# Altium PCB Copy of LED_v2.PcbDoc
Units mm, origin at the board's own origin, x right, y up, seen from the top; angles counter-clockwise.
Board outline 100 x 30 mm, 2 copper layers (Top Layer, Bottom Layer), stack 1.58 mm thick; 51 components, 38 nets, 138 pads, 16 vias.
Unrouted connection lines stored in the file: 34.
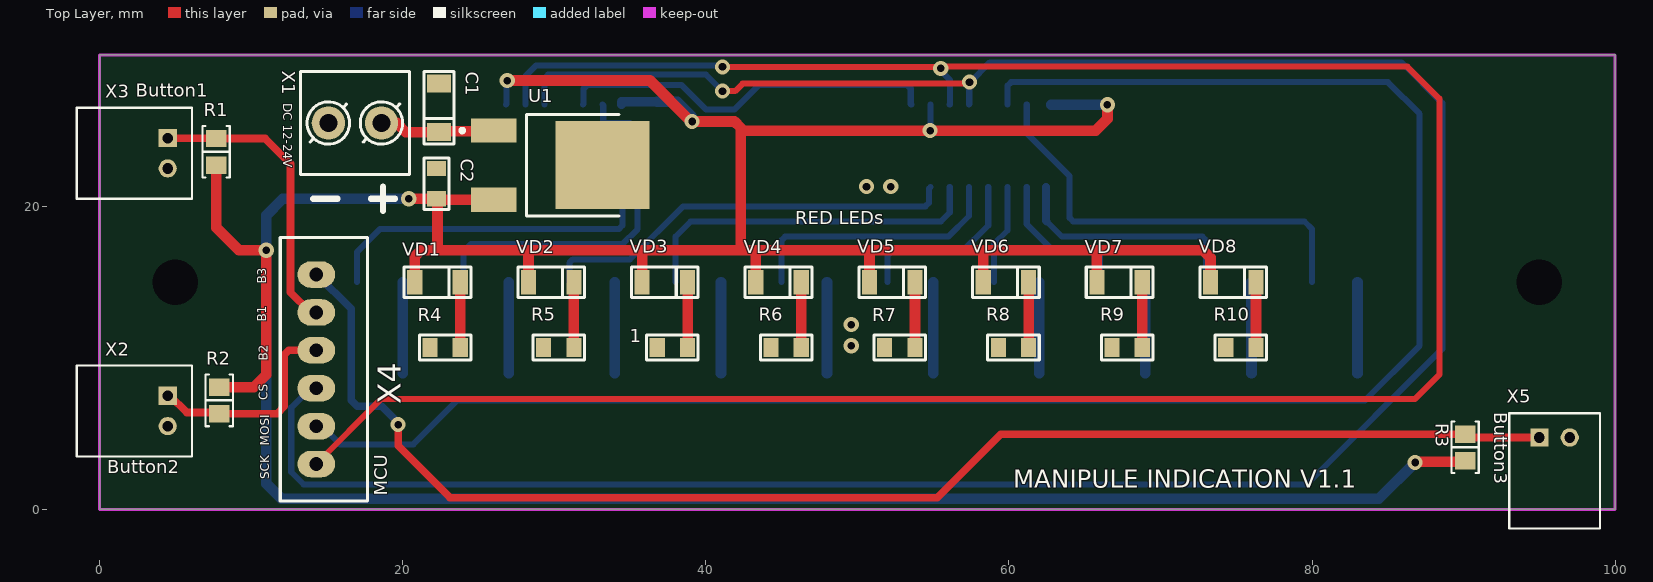
[diagram p0: Top Layer view]
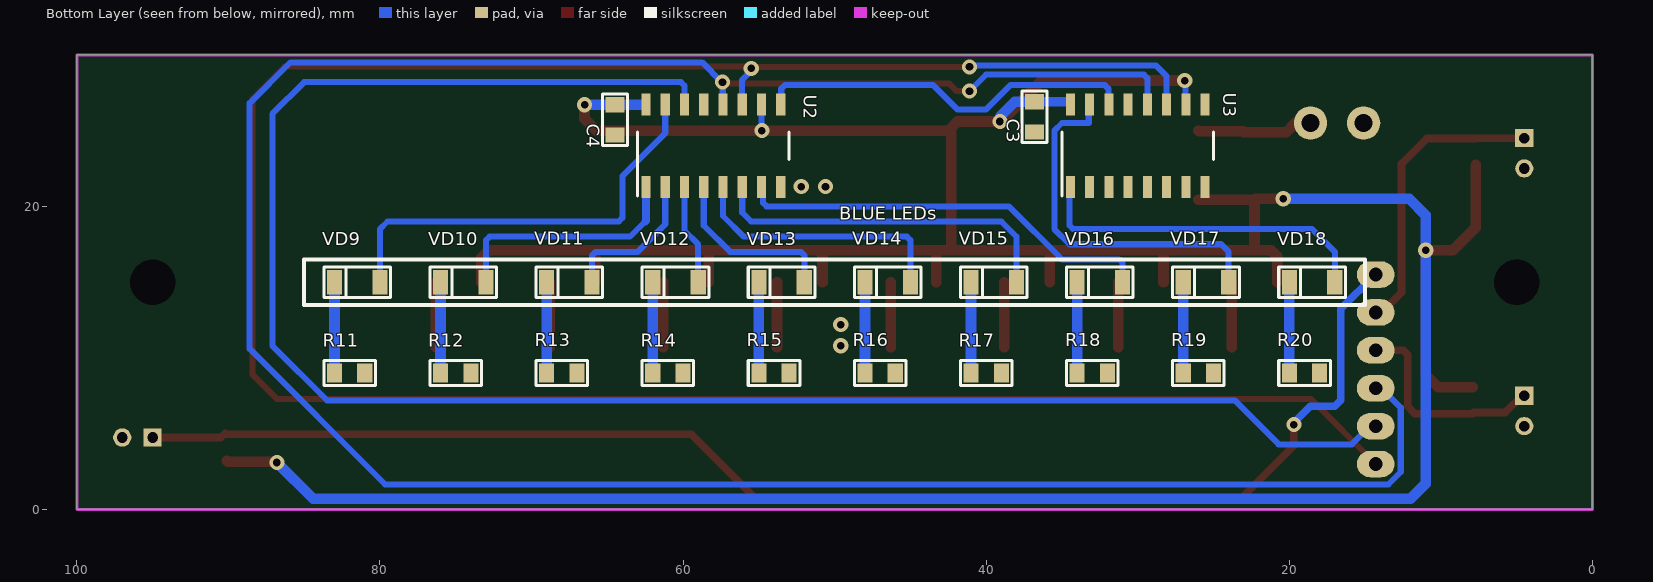
[diagram p1: Bottom Layer view, seen from below]

## Layer stack, top to bottom
Top Solder: solder mask 0.0102, Solder Resist, Dk 3.5
Top Layer: signal copper 0.0356
Dielectric 1: dielectric 1.509, FR-4, Dk 4.8
Bottom Layer: signal copper 0.0356
Bottom Solder: solder mask 0.0102, Solder Resist, Dk 3.5

## Board outline
0,0 100,0 100,30 0,30

## Design rules (kind name [scope] priority, off if disabled: settings)
BoardOutlineClearance [All] p1: gap=0.3 ignorepadtopadclearanceinfootprint=FALSE
Clearance Pad_clearance [(ObjectKind = 'Pad') And (PadViaLibraryTemplate = 'c152h300')] p1: gap=1.5 ignorepadtopadclearanceinfootprint=FALSE except(0: Arc-Hole Track-Hole SMDPad-Hole THPad-Hole Via-Hole Fill-Hole Poly-Hole Region-Hole Text-Hole)
Clearance Clearance_MultiLayerPad [OnLayer('Multi-Layer') and IsPad] p2: gap=0.2 ignorepadtopadclearanceinfootprint=FALSE except(0: Arc-Hole Track-Hole SMDPad-Hole THPad-Hole Via-Hole Fill-Hole Poly-Hole Region-Hole Text-Hole)
Clearance Clearance_Polygon [InPolygon] p3: gap=0.2 ignorepadtopadclearanceinfootprint=FALSE except(0: Arc-Hole Track-Hole SMDPad-Hole THPad-Hole Via-Hole Fill-Hole Poly-Hole Region-Hole Text-Hole)
Clearance [All] p4: gap=0.2 ignorepadtopadclearanceinfootprint=FALSE except(0: Arc-Hole Track-Hole SMDPad-Hole THPad-Hole Via-Hole Fill-Hole Poly-Hole Region-Hole Text-Hole)
ComponentClearance [All] p1: gap=0.5 collisioncheckmode=3 verticalgap=0.5 showdistances=FALSE
DiffPairsRouting [All] p1: maxlimit=0.4 minlimit=0.15 mostfreqgap=0.3 toplayer_minwidth=0.15 toplayer_maxwidth=0.3 toplayer_prefwidth=0.15 bottomlayer_minwidth=0.15 bottomlayer_maxwidth=0.3 bottomlayer_prefwidth=0.15 maxuncoupledlength=12.7
Height [All] p1: minheight=0 maxheight=50 prefheight=12.7
HoleSize [All] p1: absolutevalues=TRUE maxlimit=10 minlimit=0.3 maxpercent=80.000 minpercent=20.000
HoleToHoleClearance [All] p1: gap=0.3 allowstackedmicrovias=TRUE
MinimumSolderMaskSliver [All] p1: minsoldermaskwidth=0.2
PlaneClearance [All] p1: clearance=0.5
PlaneConnect [All] p1: planeconnectstyle=Relief reliefexpansion=0.5 reliefentries=4 reliefconductorwidth=0.3 reliefairgap=0.2
PolygonConnect PolygonConnect_PadGND [InNet('GND') and IsPad] p1: connectstyle=Direct reliefconductorwidth=0.3 reliefentries=4 polygonreliefangle="90 Angle" airgapwidth=0.2
PolygonConnect PolygonConnect_Via [IsVia] p2: connectstyle=Direct reliefconductorwidth=0.254 reliefentries=4 polygonreliefangle="90 Angle" airgapwidth=0.254
PolygonConnect [All] p3: connectstyle=Direct reliefconductorwidth=0.3 reliefentries=4 polygonreliefangle="90 Angle" airgapwidth=0.2
RoutingVias [All] p1: holewidth=0.3 width=0.7 viastyle="Through Hole" minholewidth=0.3 minwidth=0.6 maxholewidth=0.5 maxwidth=1.2
SilkToSolderMaskClearance [IsPad] p1: minsilkscreentomaskgap=0.2 clearancetoexposedcopper=TRUE
SolderMaskExpansion [All] p1: expansion=0.075 istentingtop=FALSE
Width [All] p1: maxlimit=10 minlimit=0.15 preferedwidth=0.15
21 further rules are at their usual default settings.

## Classes and differential pairs
component class LED: 1 C1 C2 C3 C4 LED2 LED3 LED4 R4 R19 R20 U1 U2 U3 VD1 VD2 VD3 VD4 VD5 VD6 VD7 VD8 VD9 VD10 VD11 VD12 VD13 VD14 VD15 VD16 VD17 VD18 X1 X2

## Components (designator, comment, footprint, x,y, rotation, side; value= is the part's Value field where it differs from the comment)
1 "Resistor film, 100R, ±5%, 0201, 0.05W, -55...+125°C" "RES: 0805" 37.8,10.7 r0 top value=100R
C1 "Tantalum capacitor, 0.47μF, 6.3V, ±10%, 2Ohm, case A (3216), -55...+125°C" "CAP: TANTAL-A" 22.4,26.5 r90 top value=0.47μF
C2 "Ceramic capacitor, 0.1μF, X7R, ±10%, 16V, 0201, -55...+125°C" "CAP: 0805" 22.225,21.5 r90 top value=0.1μF
C3 "Ceramic capacitor, 0.1μF, X7R, ±10%, 16V, 0201, -55...+125°C" "CAP: 0805" 36.8,25.9 r270 bottom value=0.1μF
C4 "Ceramic capacitor, 0.1μF, X7R, ±10%, 16V, 0201, -55...+125°C" "CAP: 0805" 64.5,25.7 r270 bottom value=0.1μF
R1 "10 kOhms" "RES 0805_2012" 7.7,23.6 r270 top
R2 "10 kOhms" "RES 0805_2012" 7.9,7.2 r90 top
R3 "10 kOhms" "RES 0805_2012" 90.1,4.1 r270 top
R4 "Resistor film, 100R, ±5%, 0201, 0.05W, -55...+125°C" "RES: 0805" 22.8,10.7 r0 top value=100R
R5 "Resistor film, 100R, ±5%, 0201, 0.05W, -55...+125°C" "RES: 0805" 30.3,10.7 r0 top value=100R
R6 "Resistor film, 100R, ±5%, 0201, 0.05W, -55...+125°C" "RES: 0805" 45.3,10.7 r0 top value=100R
R7 "Resistor film, 100R, ±5%, 0201, 0.05W, -55...+125°C" "RES: 0805" 52.8,10.7 r0 top value=100R
R8 "Resistor film, 100R, ±5%, 0201, 0.05W, -55...+125°C" "RES: 0805" 60.3,10.7 r0 top value=100R
R9 "Resistor film, 100R, ±5%, 0201, 0.05W, -55...+125°C" "RES: 0805" 67.8,10.7 r0 top value=100R
R10 "Resistor film, 100R, ±5%, 0201, 0.05W, -55...+125°C" "RES: 0805" 75.3,10.7 r0 top value=100R
R11 "Resistor film, 100R, ±5%, 0201, 0.05W, -55...+125°C" "RES: 0805" 82,9 r180 bottom value=100R
R12 "Resistor film, 100R, ±5%, 0201, 0.05W, -55...+125°C" "RES: 0805" 75,9 r180 bottom value=100R
R13 "Resistor film, 100R, ±5%, 0201, 0.05W, -55...+125°C" "RES: 0805" 68,9 r180 bottom value=100R
R14 "Resistor film, 100R, ±5%, 0201, 0.05W, -55...+125°C" "RES: 0805" 61,9 r180 bottom value=100R
R15 "Resistor film, 100R, ±5%, 0201, 0.05W, -55...+125°C" "RES: 0805" 54,9 r180 bottom value=100R
R16 "Resistor film, 100R, ±5%, 0201, 0.05W, -55...+125°C" "RES: 0805" 47,9 r180 bottom value=100R
R17 "Resistor film, 100R, ±5%, 0201, 0.05W, -55...+125°C" "RES: 0805" 40,9 r180 bottom value=100R
R18 "Resistor film, 100R, ±5%, 0201, 0.05W, -55...+125°C" "RES: 0805" 33,9 r180 bottom value=100R
R19 "Resistor film, 100R, ±5%, 0201, 0.05W, -55...+125°C" "RES: 0805" 26,9 r180 bottom value=100R
R20 "Resistor film, 100R, ±5%, 0201, 0.05W, -55...+125°C" "RES: 0805" 19,9 r180 bottom value=100R
U1 "IC_ON_Semi_MC7805BDTG_eec" ON_Semi_CASE_369C_0 31.215,22.715 r270 top
U2 "" D0016A_N 58,24 r90 bottom value=Value
U3 "" D0016A_N 30,24 r90 bottom value=Value
VD1 "LED, RED, *, *, *, -55...+150°C" "LED: 1206R" 22.3,15 r0 top
VD2 "LED, RED, *, *, *, -55...+150°C" "LED: 1206R" 29.8,15 r0 top
VD3 "LED, RED, *, *, *, -55...+150°C" "LED: 1206R" 37.3,15 r0 top
VD4 "LED, RED, *, *, *, -55...+150°C" "LED: 1206R" 44.8,15 r0 top
VD5 "LED, RED, *, *, *, -55...+150°C" "LED: 1206R" 52.3,15 r0 top
VD6 "LED, RED, *, *, *, -55...+150°C" "LED: 1206R" 59.8,15 r0 top
VD7 "LED, RED, *, *, *, -55...+150°C" "LED: 1206R" 67.3,15 r0 top
VD8 "LED, RED, *, *, *, -55...+150°C" "LED: 1206R" 74.8,15 r0 top
VD9 "LED, BLUE, *, *, *, -55...+150°C" "LED: 1206B" 81.5,15 r0 bottom
VD10 "LED, BLUE, *, *, *, -55...+150°C" "LED: 1206B" 74.5,15 r0 bottom
VD11 "LED, BLUE, *, *, *, -55...+150°C" "LED: 1206B" 67.5,15 r0 bottom
VD12 "LED, BLUE, *, *, *, -55...+150°C" "LED: 1206B" 60.5,15 r0 bottom
VD13 "LED, BLUE, *, *, *, -55...+150°C" "LED: 1206B" 53.5,15 r0 bottom
VD14 "LED, BLUE, *, *, *, -55...+150°C" "LED: 1206B" 46.5,15 r0 bottom
VD15 "LED, BLUE, *, *, *, -55...+150°C" "LED: 1206B" 39.5,15 r0 bottom
VD16 "LED, BLUE, *, *, *, -55...+150°C" "LED: 1206B" 32.5,15 r0 bottom
VD17 "LED, BLUE, *, *, *, -55...+150°C" "LED: 1206B" 25.5,15 r0 bottom
VD18 "LED, BLUE, *, *, *, -55...+150°C" "LED: 1206B" 18.5,15 r0 bottom
X1 "Terminal connector, 2pin, 3.5mm, 300VAC, 10A" "CON: DG350-3.5-02P" 16.85,25.5 r180 top
X2 "Connector, 2pin, 2.54mm, 250VAC, 3A" MW-2MR 4.5,6.5 r0 top
X3 "Connector, 2pin, 2.54mm, 250VAC, 3A" MW-2MR 4.5,23.5 r0 top
X4 "B6B-XH-A(LF)(SN)" "JST XH B6B-XH-A" 14.3,9.25 r90 top
X5 "Connector, 2pin, 2.54mm, 250VAC, 3A" MW-2MR 96,4.75 r90 top

## Footprints (in the part's own frame and the unit in brackets; to place one, negate y for a bottom-side part, rotate by r counter-clockwise, add the part's x,y. Pads: shape width x height; smd on the part's side, far side on the other; paste and mask are expansions set on the pad)
"CAP: 0805" [mm]
  rect 1x1.25 smd: 1(-1,0) 2(1,0)
  silkscreen extent -1.7,-0.82 1.7,0.82, body extent -1,-0.62 1,0.63, height 0.78
"CAP: TANTAL-A" [mm]
  rect 1.2x1.6 smd: 1(-1.6,0) 2(1.6,0)
  silkscreen extent -2.4,-1 2.4,1, body extent -1.7,-0.84 1.7,0.84, height 1.71
"CON: DG350-3.5-02P" [mm]
  round 2.2 hole 1.2: 1(-1.75,0) 2(1.75,0)
  round 0.5 on Top Overlay: ""(-3.1,-2.9)
  silkscreen extent -3.6,-3.4 3.6,3.4, body extent -4,-3.4 4,3.4, height 8.4
D0016A_N [mm]
  rect 1.45x0.6 smd paste+0 mask+0.051: 1(-2.725,4.445) 2(-2.725,3.175) 3(-2.725,1.905) 4(-2.725,0.635) 5(-2.725,-0.635) 6(-2.725,-1.905) 7(-2.725,-3.175) 8(-2.725,-4.445) 9(2.725,-4.445) 10(2.725,-3.175) 11(2.725,-1.905) 12(2.725,-0.635) 13(2.725,0.635) 14(2.725,1.905) 15(2.725,3.175) 16(2.725,4.445)
  silkscreen extent -3.3,-5 0.9,5, body extent -3.01,-4.95 3.01,4.95, height 1.75
"JST XH B6B-XH-A" [mm]
  oval 1.75x2.5 hole 0.9: 1(-6.25,0) 2(-3.75,0) 3(-1.25,0) 4(1.25,0) 5(3.75,0) 6(6.25,0)
  silkscreen extent -8.7,-3.38 8.7,2.38, body extent -8.7,-3.38 8.7,2.38, height 7
"LED: 1206B" [mm]
  rect 1x1.6 smd: 1(-1.5,0) 2(1.5,0)
  silkscreen extent -2.2,-1 2.2,1, body extent -1.6,-0.8 1.6,0.8, height 1.1
"LED: 1206R" [mm]
  rect 1x1.6 smd: 1(-1.5,0) 2(1.5,0)
  silkscreen extent -2.2,-1 2.2,1, body extent -1.6,-0.8 1.6,0.8, height 1.1
MW-2MR [mm]
  rect 1.2x1.2 hole 0.7: 1(0,1)
  round 1.2 hole 0.7: 2(0,-1)
  silkscreen extent -6,-3 1.6,3, body extent -6,-2.95 1.6,2.95, height 4.8
ON_Semi_CASE_369C_0 [mm]
  rect 1.6x3 smd paste+0 mask+0: 1(-2.285,-5.215) 3(2.285,-5.215)
  rect 5.8x6.2 smd paste+0 mask+0: 4(0,1.965)
  silkscreen extent -3.34,-7.41 3.34,3.07, body extent -3.37,-5.46 3.37,4.64, height 2.37
"RES 0805_2012" [mm] "Chip Resistor, 2-Leads, Body 2.00x1.25mm, IPC Medium Density"
  rect 1.15x1.35 smd: 1(-0.875,0) 2(0.875,0)
  silkscreen extent -1.7,-0.9 1.7,0.9, body extent -1,-0.62 1,0.63, height 0.6
"RES: 0805" [mm]
  rect 1x1.25 smd: 1(-1,0) 2(1,0)
  silkscreen extent -1.7,-0.82 1.7,0.82, body extent -1,-0.6 1,0.6, height 0.48

## Part data
1 R4 R5 R6 R7 R8 R9 R10 R11 R12 R13 R14 R15 R16 R17 R18 R19 R20: library part Resistor, Manufacturer=Yageo, Package=0201, PartNumber=RC0201JR-07100RL, Power=0.05W, Temperature=-55...+125°C, Tolerance=±5%, TypeResistor="Resistor film", HelpURL=https://www.digikey.com/product-detail/en/yageo/RC0201JR-07100RL/311-100NCT-ND/1949006, ValueManufacturerPartNumber="Resistor film, 100R, ±5%, 0201, 0.05W, -55...+125°C"
C1: library part Tantal, Manufacturer=AVX, Package="case A (3216)", PartNumber=F930J107KAAAJ6, Temperature=-55...+125°C, Tolerance=±10%, TypeCapacitor="Tantalum capacitor", TypeDielectric=X7R, Voltage=6.3V, HelpURL=https://www.digikey.com/product-detail/en/avx-corporation/F930J107KAAAJ6/478-12404-1-ND/9645231, Impedance=2Ohm, ValueManufacturerPartNumber="Tantalum capacitor, 0.47μF, 6.3V, ±10%, 2Ohm, case A (3216), -55...+125°C"
C2 C3 C4: library part Ceramic, Manufacturer=Yageo, Package=0201, PartNumber=CC0201KRX7R7BB103, Temperature=-55...+125°C, Tolerance=±10%, TypeCapacitor="Ceramic capacitor", TypeDielectric=X7R, Voltage=16V, HelpURL=https://www.digikey.com/product-detail/en/yageo/CC0201KRX7R7BB103/311-1404-1-ND/2833710, ValueManufacturerPartNumber="Ceramic capacitor, 0.1μF, X7R, ±10%, 16V, 0201, -55...+125°C"
R1 R2 R3: library part RT0805DRD0710KL, "RES SMD 10K OHM 0.5% 1/8W 0805", Device Package="0805 (2012 Metric)", Manufacturer=Yageo, Operating Temperature="-55°C ~ 155°C", Power (Watts)="0.125W, 1/8W", Supplier Device Package=0805, Supplier Part Number 1=311-2699-1-ND, Temperature Coefficient=±25ppm/°C, Tolerance=±0.5%, ComponentLink1Description=Datasheet, ComponentLink1URL=https://www.yageo.com/upload/media/product/productsearch/datasheet/rchip/PYu-RT_1-to-0.01_RoHS_L_11.pdf, ComponentLink2Description="DigiKey Link", ComponentLink2URL=http://digikey.com/product-detail/en/yageo/RT0805DRD0710KL/311-2699-1-ND/6129118, Composition="Thin Film", Height - Seated (Max)="0.024\" (0.60mm)", LastUpdated="02.09.2020 01:15:24", Lifecycle Status=Active, Minimum Order=1, Number of Terminations=2, Package / Case="0805 (2012 Metric)", Packaging=TapeAndReel, Part Number=RT0805DRD0710KL, Part Status=Active, PartId=27797, Price=0.03, Resistance="10 kOhms", Series=RT, Size / Dimension="0.079\" L x 0.049\" W (2.00mm x 1.25mm)", Supplier 1=DigiKey
U1: "IC REG LINEAR 5V 1A DPAK-3", Digikey Part Number=MC7805BDTGOS-ND, Manufacturer="ON Semi", Mfg Package Ident="CASE 369C", Mouser Part Number=863-MC7805BDTG, Part Number=MC7805BDTG, Temperature="-40°C to +125°C", Temperature Range High=+125°C, Temperature Range Low=-40°C, ComponentLink1Description=Upverter, ComponentLink1URL=https://upverter.com/upn/revision/fe0024d15b1aad39/, ComponentLink2Description=Datasheet, ComponentLink2URL=https://www.onsemi.com/pub/Collateral/MC7800-D.PDF, Digikey Description="IC REG LINEAR 5V 1A DPAK-3", HelpURL=https://upverter.com/upn/revision/fe0024d15b1aad39/, Lead Free=yes, Package="CASE 369C", RoHS=TRUE, Supplier 1=Digi-Key, Supplier 2=Mouser, Supplier Part Number 1=MC7805BDTGOS-ND, Supplier Part Number 2=863-MC7805BDTG
U2 U3: library part SN74HC595D, "No Description Available", Manufacturer="Texas Instruments", PartNumber=SN74HC595DR, Copyright="Copyright (C) 2021 Accelerated Designs. All rights reserved", RefDes=RefDes, Type=DEV
VD1 VD2 VD3 VD4 VD5 VD6 VD7 VD8: library part LED_single, Color=RED, Temperature=-55...+150°C, ColorParameter=RED, TypeDiode=LED, ValueManufacturerPartNumber="LED, RED, *, *, *, -55...+150°C"
VD9 VD10 VD11 VD12 VD13 VD14 VD15 VD16 VD17 VD18: library part LED_single, Color=BLUE, Temperature=-55...+150°C, ColorParameter=BLUE, TypeDiode=LED, ValueManufacturerPartNumber="LED, BLUE, *, *, *, -55...+150°C"
X1: library part Connector_terminal_2pin, CurrentMax=10A, Manufacturer=Degson, PartNumber=DG350-3.5-02P-14, VoltageMax=300VAC, CommentText="\"Разъем\"", HelpURL=https://www.chipdip.ru/product/dg350-3.5-02p-12, Multichannel=2pin, Pitch=3.5mm, TypeConnector="Terminal connector", ValueManufacturerPartNumber="Terminal connector, 2pin, 3.5mm, 300VAC, 10A"
X2 X3 X5: library part CWF-2, CurrentMax=3A, Manufacturer=Connfly, PartNumber=CWF-2R, VoltageMax=250VAC, CommentText="\"Разъем\"", HelpURL=https://www.chipdip.ru/product/cwf-2r-ds1069-2-mr, Multichannel=2pin, Pitch=2.54mm, TypeConnector=Connector, ValueManufacturerPartNumber="Connector, 2pin, 2.54mm, 250VAC, 3A"
X4: "CONN HEADER VERT 6POS 2.5MM", Current Rating (Amps)=3A, Insulation Color=Natural, Manufacturer="JST Sales America Inc.", Material Flammability Rating="UL94 V-0", Operating Temperature="-25°C ~ 85°C", Supplier Part Number 1=455-2271-ND, Voltage Rating=250V, ComponentLink1Description=Datasheet, ComponentLink1URL=http://www.jst-mfg.com/product/pdf/eng/eXH.pdf, ComponentLink2Description="DigiKey Link", ComponentLink2URL=http://digikey.com/product-detail/en/jst-sales-america-inc/B6B-XH-A-LF-SN/455-2271-ND/1000381, Connector Type=Header, Contact Finish - Mating=Tin, Contact Finish - Post=Tin, Contact Length - Post="0.134\" (3.40mm)", Contact Material=Brass, Contact Shape=Square, Contact Type="Male Pin", Fastening Type="Detent Lock", Insulation Height="0.276\" (7.00mm)", Insulation Material="Polyamide (PA66), Nylon 6/6", LastUpdated="12.01.2020 23:46:58", Lifecycle Status=Active, Minimum Order=1, Mounting Type="Through Hole", Number of Positions=6, Number of Positions Loaded=All, Number of Rows=1, Packaging=Bulk, Part Number=B6B-XH-A(LF)(SN), Part Status=Active, PartId=71, Pitch - Mating="0.098\" (2.50mm)", Price=0.27, Series=XH, Shrouding="Shrouded - 4 Wall", Style="Board to Cable/Wire", Supplier 1=DigiKey, Termination="Press-Fit, Solder"

## Free pads (board coordinates)
  round 1.524 hole 3: 1(5,15) 1(95,15)

## Via types
v1: diameter 1, hole 0.5, Top Layer to Bottom Layer, tented both sides, 16 vias

## Nets (pads, with @x,y where several pads share a name; then routed paths per layer and width w, separated by ;. In a path a pad name is that pad's centre, name@x,y a point inside that pad or via, vN(x,y) a via of type N, cw(c..) or ccw(c..) an arc to the next point about the centre after c; other vN are vias at no path point)
5V: C2.1 C3.1 C4.1 R1.2 R2.2 R3.2 U1.3 U2.10 U2.16 U3.10 U3.16 VD1.1 VD2.1 VD3.1 VD4.1 VD5.1 VD6.1 VD7.1 VD8.1 | length 268.5
  Top Layer w0.7: R1.2 7.7,18.6 9.2,17.1 v1(11,17.1) 11,8.9 10.175,8.075 R2.2 ; v1(20.4,20.5) C2.1 ; VD1.1 20.8,16.69 21.21,17.1 22.3,17.1 ; C2.1@22.225,20.43 U1.3 ; C2.1@22.3,20.35 22.3,17.1 ; v1(26.9,28.3) 36.319,28.3 39.019,25.6 v1(39.1,25.6) 41.89,25.6 42.3,25.19 42.3,25 ; VD2.1 28.3,17 28.2,17.1 ; VD3.1 35.8,17 35.7,17.1 ; VD4.1 43.3,17 43.2,17.1 ; VD5.1 50.8,17 50.9,17.1 ; VD6.1 58.3,17.1 ; VD7.1 65.8,17 65.9,17.1 ; v1(66.5,26.7) 66.5,25.775 65.725,25 v1(54.8,25) 42.3,25 ; VD8.1 73.3,16.6 72.8,17.1 65.9,17.1 ; v1(86.8,3.1) 86.857,3.157 90.032,3.157 R3.2 ; 22.3,17.1 28.2,17.1 ; 28.2,17.1 35.7,17.1 ; 35.7,17.1 42.3,17.1 ; 42.3,17.1 42.3,25 ; 42.3,17.1 43.2,17.1 ; 43.2,17.1 50.9,17.1 ; 50.9,17.1 58.3,17.1 ; 58.3,17.1 65.9,17.1
  Bottom Layer w0.4: U3.10 26.863,26.762 26.863,28.263 v1(26.9,28.3) ; v1(54.8,25) 54.812,25.013 54.812,26.712 U2.10
  Bottom Layer w0.6: U3.16 34.445,26.9 C3.1
  Bottom Layer w0.7: v1(20.4,20.5) 12.1,20.5 11,19.4 v1(11,17.1) 11,1.71 12.01,0.7 84.4,0.7 v1(86.8,3.1) ; C3.1 38.119,26.9 39.043,25.976 39.043,25.657 v1(39.1,25.6) ; 62.788,26.712 64.488,26.712 C4.1 v1(66.5,26.7)
B1: R2.1 X2.1 X4.4 | length 14.2
  Top Layer w0.5: X2.1 4.643,7.5 5.743,6.4 7.825,6.4 R2.1 11.725,6.325 12.2,6.8 12.2,10.207 12.493,10.5 X4.4 X4.4@14.2,10.4
B2: R1.1 X3.1 X4.5 | length 19.5
  Top Layer w0.5: X3.1 4.513,24.487 7.688,24.487 R1.1 10.925,24.475 12.6,22.8 12.6,14.325 13.925,13 X4.5
BREV: R3.1 X4.6 X5.1 | length 93.3
  Top Layer w0.5: X4.6 X4.6@14.675,15.5 ; v1(19.7,5.6) 19.7,4.2 23.125,0.775 55.263,0.775 59.463,4.975 R3.1 ; R3.1@90.2,5.043 90.493,4.75 X5.1
  Bottom Layer w0.5: X4.6 14.337,15.5 16.6,13.237 16.6,7.2 17,6.8 18.612,6.8 19.668,5.743 v1@19.668,5.6
GND: 1.1 C1.2 C2.2 C3.2 C4.2 R4.1 R5.1 R6.1 R7.1 R8.1 R9.1 R10.1 R11.2 R12.2 R13.2 R14.2 R15.2 R16.2 R17.2 R18.2 R19.2 R20.2 U1.4 U2.8 U2.13 U3.8 U3.13 X1.2 X2.2 X3.2 X5.2
  other v1: 49.6,10.8 49.6,12.2 50.6,21.3 52.2,21.3
Net1_2: 1.2 VD3.2 | length 4.3
  Top Layer w0.7: 1.2 VD3.2
NetC1_1: C1.1 U1.1 X1.1 | length 7.7
  Top Layer w0.7: X1.1 19.6,25.5 20.2,24.9 23,24.9 23.05,24.95 25.95,24.95 U1.1
NetR4_2: R4.2 VD1.2 | length 4.3
  Top Layer w0.7: R4.2 VD1.2
NetR5_2: R5.2 VD2.2 | length 4.3
  Top Layer w0.7: R5.2 VD2.2
NetR6_2: R6.2 VD4.2 | length 4.3
  Top Layer w0.7: R6.2 VD4.2
NetR7_2: R7.2 VD5.2 | length 4.3
  Top Layer w0.7: R7.2 VD5.2
NetR8_2: R8.2 VD6.2 | length 4.3
  Top Layer w0.7: R8.2 VD6.2
NetR9_2: R9.2 VD7.2 | length 4.3
  Top Layer w0.7: R9.2 VD7.2
NetR10_2: R10.2 VD8.2 | length 4.3
  Top Layer w0.7: R10.2 VD8.2
NetR11_1: R11.1 VD9.2 | length 6
  Bottom Layer w0.7: R11.1 VD9.2
NetR12_1: R12.1 VD10.2 | length 6
  Bottom Layer w0.7: R12.1 VD10.2
NetR13_1: R13.1 VD11.2 | length 6
  Bottom Layer w0.7: R13.1 VD11.2
NetR14_1: R14.1 VD12.2 | length 6
  Bottom Layer w0.7: R14.1 VD12.2
NetR15_1: R15.1 VD13.2 | length 6
  Bottom Layer w0.7: R15.1 VD13.2
NetR16_1: R16.1 VD14.2 | length 6
  Bottom Layer w0.7: R16.1 VD14.2
NetR17_1: R17.1 VD15.2 | length 6
  Bottom Layer w0.7: R17.1 VD15.2
NetR18_1: R18.1 VD16.2 | length 6
  Bottom Layer w0.7: R18.1 VD16.2
NetR19_1: R19.1 VD17.2 | length 6
  Bottom Layer w0.7: R19.1 VD17.2
NetR20_1: R20.1 VD18.2 | length 6
  Bottom Layer w0.7: R20.1 VD18.2
NetU2_1: U2.1 VD10.1 | length 16.1
  Bottom Layer w0.4: 62.5,19 63.5,18 72.766,18 73,17.766 VD10.1
  Bottom Layer w0.5: U2.1 62.445,19.055 62.5,19
NetU2_2: U2.2 VD11.1 | length 9.9
  Bottom Layer w0.4: U2.2 61.175,18.825 63,17 65.766,17 66,16.766 VD11.1
NetU2_3: U2.3 VD12.1 | length 6.6
  Bottom Layer w0.4: VD12.1 59,17.5 59.905,18.405 U2.3
NetU2_4: U2.4 VD13.1 | length 11.8
  Bottom Layer w0.4: VD13.1 52,16.766 52.234,17 56.901,17 58.635,18.734 U2.4
NetU2_5: U2.5 VD14.1 | length 17.7
  Bottom Layer w0.4: VD14.1 45,17.766 45.234,18 56,18 57.365,19.365 U2.5
NetU2_6: U2.6 VD15.1 | length 23.4
  Bottom Layer w0.4: VD15.1 38,18 39,19 55.5,19 56.095,19.595 U2.6
NetU2_7: U2.7 VD16.1 | length 27.7
  Bottom Layer w0.4: VD16.1 31,16.266 31.234,16.5 35,16.5 38.5,20 54.491,20 54.725,20.234 54.725,21.175 U2.7
NetU2_9: U2.9 U3.14 | length 25.2
  Bottom Layer w0.4: U3.14 31.938,26.758 31.938,27.766 32.172,28 38.4,28 40,26.4 41.9,26.4 43.5,28 53.288,28 53.522,27.766 53.522,26.758 U2.9
NetU2_15: U2.15 VD9.1 | length 28.5
  Bottom Layer w0.4: U2.15 61.175,24.825 64,22 64,19.234 64.234,19 79.5,19 80,18.5 VD9.1
NetU3_1: U3.1 VD18.1 | length 22.8
  Bottom Layer w0.4: VD18.1 17,17 18.5,18.5 34.266,18.5 34.5,18.734 34.5,21.22 U3.1
NetU3_15: U3.15 VD17.1 | length 24.3
  Bottom Layer w0.4: VD17.1 24,17 24.5,17.5 34.5,17.5 35.5,18.5 35.5,25 35,25.5 33.234,25.5 33.234,26.666 U3.15
RCLK: U2.12 U3.12 X4.3 | length 167.5
  Top Layer w0.4: v1(41.1,27.6) 41.937,27.6 42.437,28.1 57.3,28.1 v1(57.4,28.2)
  Bottom Layer w0.4: X4.3 13.925,8 12.65,6.725 12.65,2.472 13.472,1.65 79.65,1.65 88.6,10.6 88.6,26.8 85.9,29.5 58.738,29.5 57.438,28.2 v1(57.4,28.2) 57.382,28.182 57.382,26.742 U2.12 ; U3.12 29.365,28.451 29.599,28.685 40.015,28.685 v1(41.1,27.6)
SER: U2.14 X4.2 | length 121.1
  Bottom Layer w0.4: X4.2@14.558,5.758 X4.2 14.675,5.5 15.875,4.3 20.7,4.3 23.6,7.2 83.491,7.2 87.1,10.809 87.1,26.1 85,28.2 60.139,28.2 59.905,27.966 U2.14
SRCLK: U2.11 U3.11 X4.1 | length 160.8
  Top Layer w0.4: X4.1 18.6,7.3 86.8,7.3 88.4,8.9 88.4,27.1 86.285,29.215 55.615,29.215 v1(55.5,29.1) 55.4,29.2 v1(41.1,29.2)
  Bottom Layer w0.4: U3.11 28.095,28.595 28.785,29.285 41.015,29.285 v1(41.1,29.2) ; v1(55.5,29.1) 55.5,28.938 56.098,28.34 56.098,26.727 U2.11
pads on no net: U3.2 U3.3 U3.4 U3.5 U3.6 U3.7 U3.9 X1.

## Keep-outs
Keep-Out Layer:
  the board outline again, w0.2

## Other copper
Top Layer:
  pour cut-out: 10.9,6.8 10.9,0.1 29.2,0.1 29.2,6.8
  pour cut-out: 40.448,28.93 40.455,28.923 40.455,27.883 56.476,27.883 56.837,28.245 56.837,28.807
Bottom Layer:
  pour cut-out: 11.3,6.7 11.3,0.1 29.2,0.1 29.2,6.7
  pour cut-out: 60.405,25.8 61.945,25.8 61.945,27.65 60.405,27.65
  pour cut-out: 56.075,29.694 58.173,29.694 57.547,29.068 57.547,28.371 56.865,27.689 56.865,25.8 56.595,25.8
  pour cut-out: 40.938,28.519 40.938,28.863 41.769,29.694 54.925,29.694 54.925,28.936 55.69,28.171 55.595,28.077 55.595,25.8 54.055,25.8 54.055,27.766 53.444,28.377 43.3,28.377 41.731,26.808 41.339,26.808

## Silkscreen, mask and mechanical layers (free items; w line width, h text height)
Top Overlay:
  lines w0.4: 14.1,20.5 15.7,20.5 ; 17.9,20.5 19.5,20.5 ; 18.7,19.7 18.7,21.3
  text "Button1" at 2.4,26.918 h1.5
  text "DC 12-24V" at 11.911,26.8 h1 r270
  text "RED LEDs" at 45.9,18.517 h1.5
  text "B3" at 11.188,14.9 h1 r90
  text "B1" at 11.2,12.4 h1 r90
  text "B2" at 11.3,9.8 h1 r90
  text "CS" at 11.289,7.2 h1 r90
  text "Button3" at 91.718,6.4 h1.5 r270
  text "MOSI" at 11.388,4.2 h1 r90
  text "Button2" at 0.5,2.1 h1.5
  text "SCK" at 11.389,2 h1 r90
  text "MANIPULE INDICATION V1.1" at 60.3,1.024 h2
  text "MCU" at 19.282,0.9 h1.5 r90
Bottom Overlay:
  lines w0.254: 15,13.5 85,13.5 85,15 85,16.5 15,16.5 15,15 15,13.5
  text "BLUE LEDs" at 49.7,18.818 h1.5

## Dimensions
0,0 to 0,30 on Size
0,30 to 100,30 on Size